# Altium PCB gravpower 007.PcbDoc (part 2 of 2)
Units mil, origin at the board's own origin, x right, y up, seen from the top; angles counter-clockwise.
Board outline 3267.72 x 2322.83 mil, 4 copper layers (Top Layer, Signal Layer 1, Signal Layer 2, Bottom Layer), stack 59.3 mil thick; 146 components, 91 nets, 539 pads, 438 vias.
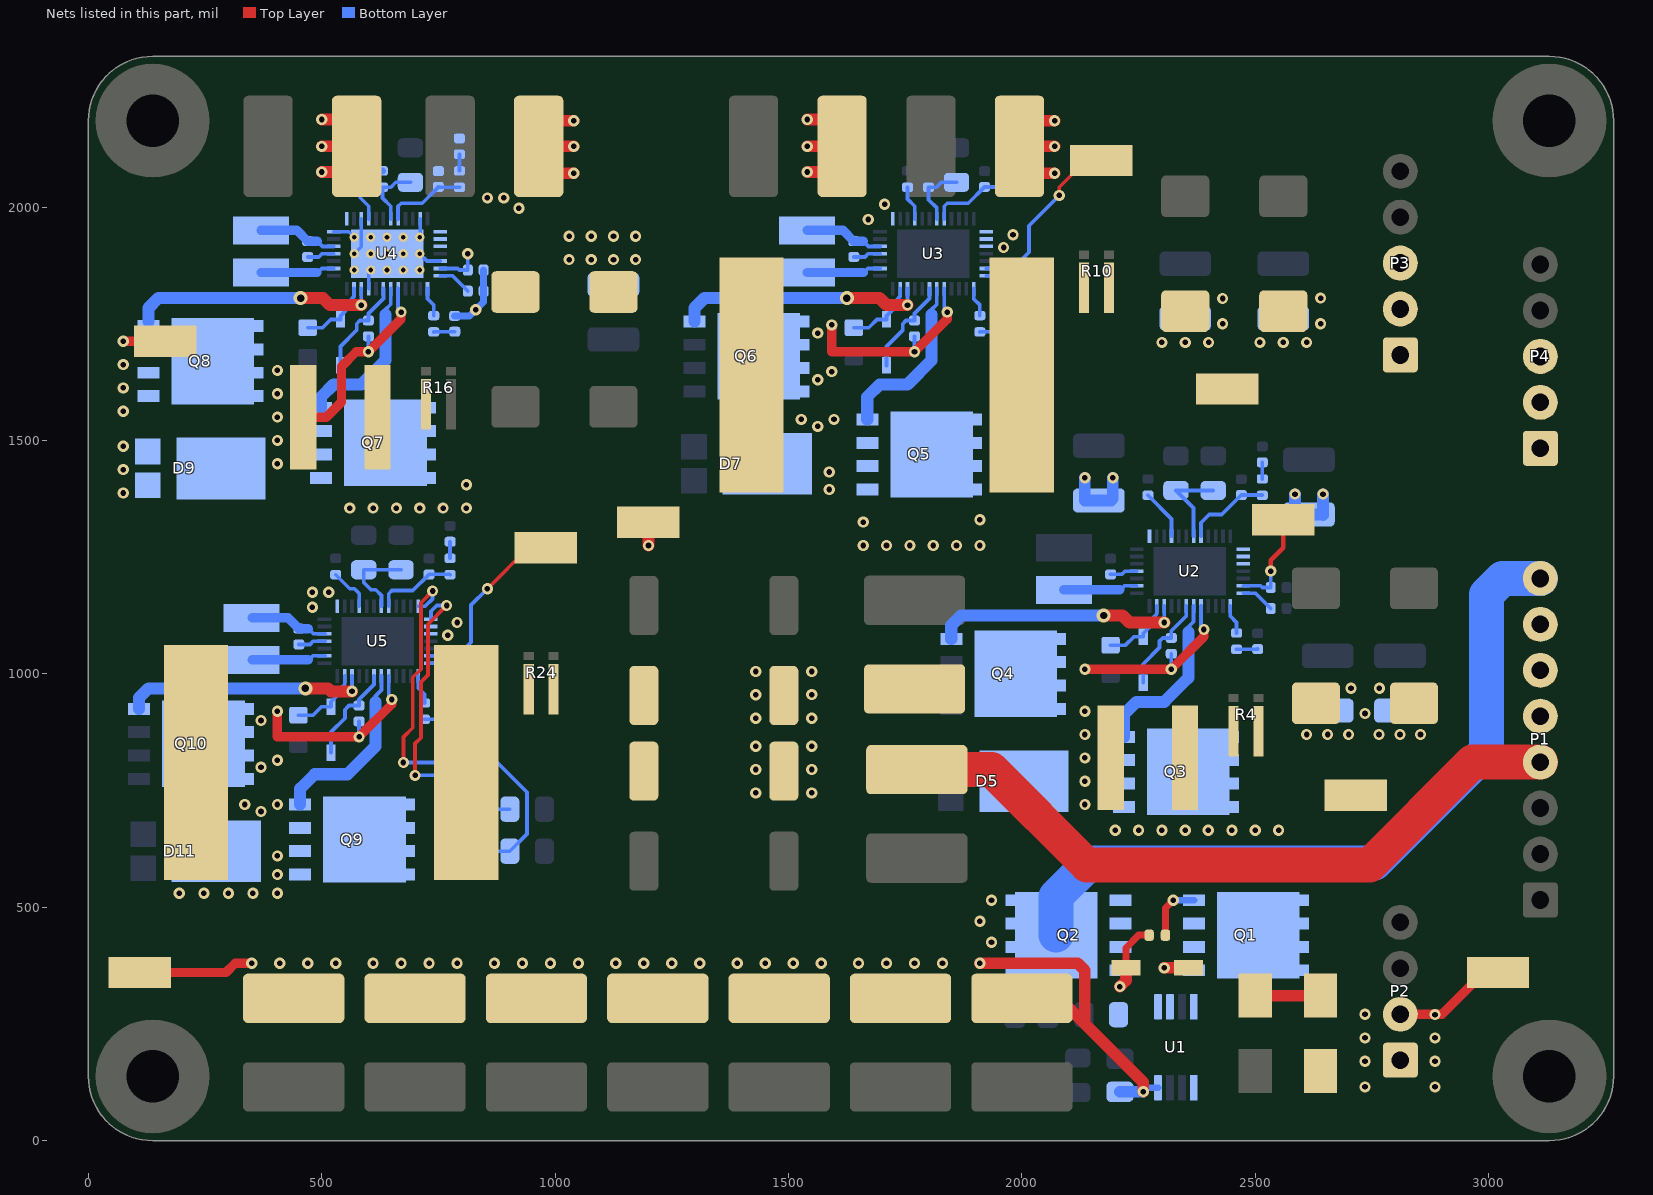
[diagram p4: the nets of this part, all layers, seen from the top]

## Via types
v1: diameter 24, hole 12, Top Layer to Bottom Layer, tented both sides, 374 vias
v2: diameter 20, hole 10, Top Layer to Bottom Layer, 60 vias
v3: diameter 30, hole 16, Top Layer to Bottom Layer, 4 vias

## Nets (pads, with @x,y where several pads share a name; then routed paths per layer and width w, separated by ;. In a path a pad name is that pad's centre, name@x,y a point inside that pad or via, vN(x,y) a via of type N, cw(c..) or ccw(c..) an arc to the next point about the centre after c; other vN are vias at no path point) (continued)
NetC10_2: C10.2 U2.35 | length 58.9
  Bottom Layer w8: C10.2@2190,1213.07 2213.67,1213.07 2220.6,1220 U2.35@2246.02,1220
NetC11_1: C11.1 D4.A U2.30 | length 155.6
  Bottom Layer w8: C11.1@2190,1061.5 2221.73,1061.5 2239.45,1079.21 D4.A@2260,1079.21 2260,1086.38 2280,1106.38 2280,1119.17 2289.13,1128.3 U2.30@2289.13,1145.39
NetC12_1: C12.1 D4.K U2.26 | length 213.4
  Bottom Layer w8: D4.K@2260,980.79 2260,1021.38 2295,1056.38 2295,1070.16 2301.77,1076.93 C12.1@2320,1076.93 2320,1091.93 2352.13,1124.06 U2.26@2352.13,1145.39
NetC12_2: C12.2 D5.K L2.1 Q3.1 Q3.2 Q3.3 Q4.5 Q4.6 Q4.7 Q4.8 Q4.9 U2.24 | length 385.1
  Top Layer w20: v1(2135,1010) v1(2320,1010) 2390,1080 v1(2390,1095)
  Bottom Layer w8: v1(2320,1010) C12.2@2320,1043.07 ; U2.24@2383.62,1145.39 2383.62,1101.38 v1(2390,1095)
  other v1: 2135,720 2135,770 2135,820 2135,870 2135,920
NetC19_2: C19.2 R8.2 U2.8 | length 185.3
  Bottom Layer w8: U2.8@2383.62,1294.61 2383.62,1323.62 2401.34,1341.34 2428.27,1341.34 C19.2@2470,1383.07 2514.41,1383.07 R8.2@2515,1382.48
NetC20_1: C20.1 U2.19 | length 72.7
  Bottom Layer w8: U2.19@2473.98,1172.76 2500.32,1172.76 C20.1@2533.07,1140
NetC21_1: C21.1 R8.1 | length 35.6
  Bottom Layer w8: R8.1@2515,1417.52 C21.1@2515,1453.07
NetC22_1: C22.1 TP4.1 U2.18 | length 216.8
  Top Layer w10: v1(2532.95,1220) 2532.95,1242.95 2560,1270 TP4.1@2560,1330
  Bottom Layer w8: U2.18@2473.98,1188.5 2511.5,1188.5 2515,1185 C22.1@2533.07,1185 2533.07,1219.88 v1(2532.95,1220)
NetC23_2: C23.2 R9.2 | length 45.2
  Bottom Layer w8: R9.2@2460,1052.48 2504.41,1052.48 C23.2@2505,1053.07
NetC24_1: C24.1 L3.1 U3.36 | length 170.2
  Bottom Layer w8: 1660.43,1926.93 1671.61,1915.75 U3.36@1696.02,1915.75
  Bottom Layer w20: L3.1@1540,1950.08 1616.85,1950.08 C24.1@1640,1926.93 1660.43,1926.93
NetC24_2: C24.2 U3.35 | length 58.9
  Bottom Layer w8: C24.2@1640,1893.07 1663.67,1893.07 1670.6,1900 U3.35@1696.02,1900
NetC25_1: C25.1 D6.A U3.30 | length 155.6
  Bottom Layer w8: C25.1@1640,1741.5 1671.73,1741.5 1689.45,1759.21 D6.A@1710,1759.21 1710,1766.38 1730,1786.38 1730,1799.17 1739.13,1808.3 U3.30@1739.13,1825.39
NetC26_1: C26.1 D6.K U3.26 | length 213.4
  Bottom Layer w8: D6.K@1710,1660.79 1710,1701.38 1745,1736.38 1745,1750.16 1751.77,1756.93 C26.1@1770,1756.93 1770,1771.93 1802.13,1804.06 U3.26@1802.13,1825.39
NetC26_2: C26.2 D7.K L4.1 Q5.1 Q5.2 Q5.3 Q6.5 Q6.6 Q6.7 Q6.8 Q6.9 U3.24 | length 435.1
  Top Layer w20: v1(1592.5,1747.5) 1592.5,1690 v1(1770,1690) 1840,1760 v1(1840,1775)
  Bottom Layer w8: v1(1770,1690) C26.2@1770,1723.07 ; U3.24@1833.62,1825.39 1833.62,1781.38 v1(1840,1775)
  other v1: 1587.5,1395 1587.5,1432.5 1562.5,1530 1527.5,1545 1597.5,1545 1562.5,1630 1592.5,1647.5 1562.5,1730
NetC33_2: C33.2 R14.2 U3.8 | length 175.8
  Bottom Layer w8: U3.8@1833.62,1974.61 1833.62,2001.64 1840.3,2008.32 1885.25,2008.32 C33.2@1920,2043.07 1964.41,2043.07 R14.2@1965,2042.48
NetC34_1: C34.1 U3.19 | length 72.7
  Bottom Layer w8: U3.19@1923.98,1852.76 1950.32,1852.76 C34.1@1983.07,1820
NetC35_1: C35.1 R14.1 | length 35.6
  Bottom Layer w8: R14.1@1965,2077.52 C35.1@1965,2113.07
NetC36_1: C36.1 TP6.1 U3.18 | length 392
  Top Layer w8: v1(2080,2025) 2080,2042.5 2137.5,2100 TP6.1@2170,2100
  Bottom Layer w8: U3.18@1923.98,1868.5 1961.5,1868.5 1965,1865 C36.1@1983.07,1865 1983.07,1871.46 2015,1903.39 2015,1960 v1(2080,2025)
NetC37_2: C37.2 R15.2 | length 45.2
  Bottom Layer w8: R15.2@1910,1732.48 1910.59,1733.07 C37.2@1955,1733.07
NetC38_1: C38.1 L5.1 U4.36 | length 170.2
  Bottom Layer w8: 490.43,1926.93 501.61,1915.75 U4.36@526.02,1915.75
  Bottom Layer w20: L5.1@370,1950.08 446.85,1950.08 C38.1@470,1926.93 490.43,1926.93
NetC38_2: C38.2 U4.35 | length 58.9
  Bottom Layer w8: C38.2@470,1893.07 493.67,1893.07 500.6,1900 U4.35@526.02,1900
NetC39_1: C39.1 D8.A U4.30 | length 155.6
  Bottom Layer w8: C39.1@470,1741.5 501.73,1741.5 519.45,1759.21 D8.A@540,1759.21 540,1766.38 560,1786.38 560,1799.17 569.13,1808.3 U4.30@569.13,1825.39
NetC40_1: C40.1 D8.K U4.26 | length 213.4
  Bottom Layer w8: D8.K@540,1660.79 540,1701.38 575,1736.38 575,1750.16 581.77,1756.93 C40.1@600,1756.93 600,1771.93 632.13,1804.06 U4.26@632.13,1825.39
NetC40_2: C40.2 D9.K L6.1 Q7.1 Q7.2 Q7.3 Q8.5 Q8.6 Q8.7 Q8.8 Q8.9 U4.24 | length 442.1
  Top Layer w20: L6.1@460.47,1550 510,1550 542.5,1582.5 542.5,1658.5 574,1690 v1(600,1690) 670,1760 v1(670,1775)
  Bottom Layer w8: v1(600,1690) C40.2@600,1723.07 ; U4.24@663.62,1825.39 663.62,1781.38 v1(670,1775)
  other v1: 405,1450 405,1500 405,1550 405,1600 405,1650
NetC46_2: C46.2 R20.2 U4.8 | length 175.8
  Bottom Layer w8: U4.8@663.62,1974.61 663.62,2001.64 670.3,2008.32 715.25,2008.32 C46.2@750,2043.05 750.59,2042.46 R20.2@795,2042.46
NetC47_1: C47.1 U4.19 | length 72.7
  Bottom Layer w8: U4.19@753.98,1852.76 780.32,1852.76 C47.1@813.07,1820
NetC48_1: C48.1 R20.1 | length 35.6
  Bottom Layer w8: R20.1@795,2077.5 C48.1@795,2113.05
NetC49_1: C49.1 U4.18 | length 95.6
  Bottom Layer w8: U4.18@753.98,1868.5 791.5,1868.5 795,1865 C49.1@813.07,1865 813.07,1899.88 v1(812.95,1900)
NetC50_2: C50.2 R21.2 | length 45.2
  Bottom Layer w8: R21.2@740,1732.48 740.59,1733.07 C50.2@785,1733.07
NetC51_1: C51.1 L7.1 U5.36 | length 170.2
  Bottom Layer w8: 471.42,1096.93 482.6,1085.75 U5.36@506.02,1085.75 U5.36@507.01,1085.75
  Bottom Layer w20: L7.1@350.99,1120.08 427.84,1120.08 C51.1@450.99,1096.93 471.42,1096.93
NetC51_2: C51.2 U5.35 | length 58.9
  Bottom Layer w8: C51.2@450.99,1063.07 474.66,1063.07 481.59,1070 U5.35@506.02,1070 U5.35@507.01,1070
NetC52_1: C52.1 D10.A U5.30 | length 155.6
  Bottom Layer w8: C52.1@450,911.5 481.5,911.5 499.21,929.21 D10.A@520,929.21 520,940 540,960 540,968.74 549.13,977.88 U5.30@549.13,995.39
NetC53_1: C53.1 D10.K U5.26 | length 215.2
  Bottom Layer w8: D10.K@520,830.79 520,875.15 549.85,905 549.85,923.06 558.72,931.93 C53.1@580,931.93 580,945 612.13,977.13 U5.26@612.13,995.39
NetC53_2: C53.2 D11.K L8.1 Q9.1 Q9.2 Q9.3 Q10.5 Q10.6 Q10.7 Q10.8 Q10.9 U5.24 | length 425.1
  Top Layer w20: v1(405,920) 405,865 v1(580,865) 650,935 v1(650,945)
  Bottom Layer w8: v1(580,865) C53.2@580,898.07 ; U5.24@643.62,995.39 643.62,951.38 v1(650,945)
  other v1: 195,530 247.5,530 300,530 352.5,530 405,530 405,570 405,610 370,705 335,720 405,720 370,800 405,815 370,900
NetC60_2: C60.2 R30.2 U5.8 | length 175.8
  Bottom Layer w8: U5.8@643.62,1144.61 643.62,1171.64 650.3,1178.32 695.25,1178.32 C60.2@730,1213.07 774.41,1213.07 R30.2@775,1212.48
NetC61_1: C61.1 U5.19 | length 72.7
  Bottom Layer w8: U5.19@733.98,1022.76 760.32,1022.76 C61.1@793.07,990
NetC62_1: C62.1 R30.1 | length 35.6
  Bottom Layer w8: R30.1@775,1247.52 C62.1@775,1283.07
NetC63_1: C63.1 TP9.1 U5.18 | length 394.9
  Top Layer w8: v1(855,1182.5) 942.5,1270 TP9.1@980,1270
  Bottom Layer w8: U5.18@733.98,1038.5 766.5,1038.5 770,1035 C63.1@793.07,1035 793.07,1040.57 820,1067.5 820,1147.5 v1(855,1182.5)
NetC64_2: C64.2 R31.2 | length 45.2
  Bottom Layer w8: R31.2@720,902.48 764.41,902.48 C64.2@765,903.07
NetD1_1: D1.1 D3.1 | length 140
  Top Layer w25: D3.1@2500,310.71 D1.1@2640,310.71
NetD2_1: D2.1 Q1.1 Q1.2 Q1.3 Q2.1 Q2.2 Q2.3 U1.2 | length 52
  Top Layer w25: v1(2304.88,370) D2.1@2356.93,370
NetD2_2: D2.2 Q2.4 R1.1 R2.2 U1.1 | length 149
  Top Layer w15: D2.2@2223.07,370 2223.07,413.07 2250,440 R1.1@2272.48,440
  Top Layer w25: v1(2210,330) 2223.07,343.07 D2.2@2223.07,370
NetL1_2: L1.2 U2.33 | length 159.6
  Bottom Layer w8: 2210,1179.92 2211.42,1179.92 2220,1188.5 U2.33@2246.02,1188.5
  Bottom Layer w20: L1.2@2090,1179.92 2210,1179.92
NetL2_2: L2.2 R4.1
NetL3_2: L3.2 U3.33 | length 159.6
  Bottom Layer w8: 1660,1859.92 1661.42,1859.92 1670,1868.5 U3.33@1696.02,1868.5
  Bottom Layer w20: L3.2@1540,1859.92 1660,1859.92
NetL4_2: L4.2 R10.1
NetL5_2: L5.2 U4.33 | length 159.6
  Bottom Layer w8: 490,1859.92 491.42,1859.92 500,1868.5 U4.33@526.02,1868.5
  Bottom Layer w20: L5.2@370,1859.92 490,1859.92
NetL6_2: L6.2 R16.1
NetL7_2: L7.2 U5.33 | length 159.6
  Bottom Layer w8: 470.99,1029.92 472.4,1029.92 480.99,1038.5 U5.33@506.02,1038.5 U5.33@507.01,1038.5
  Bottom Layer w20: L7.2@350.99,1029.92 470.99,1029.92
NetL8_2: L8.2 R24.1
NetQ1_4: Q1.4 R1.2 | length 126.3
  Top Layer w15: R1.2@2307.52,440 2307.52,498.08 v1(2324.44,515)
  Bottom Layer w14: v1(2324.44,515) Q1.4@2368.78,515
NetQ3_4: Q3.4 U2.25 | length 377.1
  Bottom Layer w8: 2356.57,1090 2356.57,1100.5 2367.87,1111.8 U2.25@2367.87,1145.39
  Bottom Layer w26: Q3.4@2218.78,865 2218.78,913.39 2245.39,940 2305,940 2356.57,991.57 2356.57,1090
NetQ4_4: Q4.4 U2.29 | length 535.3
  Top Layer w26: v3(2175,1125) 2215.75,1125 2230.75,1110 v1(2304.88,1110)
  Bottom Layer w8: v1(2304.88,1110) U2.29@2304.88,1145.39
  Bottom Layer w26: Q4.4@1848.78,1075 1848.78,1103.78 1870,1125 v3(2175,1125)
NetQ5_4: Q5.4 U3.25 | length 377.1
  Bottom Layer w8: 1806.57,1770 1806.57,1780.5 1817.87,1791.8 U3.25@1817.87,1825.39
  Bottom Layer w26: Q5.4@1668.78,1545 1668.78,1593.39 1695.39,1620 1755,1620 1806.57,1671.57 1806.57,1770
NetQ6_4: Q6.4 U3.29 | length 535.3
  Top Layer w26: v3(1625,1805) 1695,1805 1710,1790 v1(1754.88,1790)
  Bottom Layer w8: v1(1754.88,1790) U3.29@1754.88,1825.39
  Bottom Layer w26: Q6.4@1298.78,1755 1298.78,1783.78 1320,1805 v3(1625,1805)
NetQ7_4: Q7.4 U4.25 | length 352.1
  Bottom Layer w8: 636.57,1770 636.57,1780.5 647.87,1791.8 U4.25@647.87,1825.39
  Bottom Layer w26: Q7.4@498.78,1570 498.78,1593.39 525.39,1620 585,1620 636.57,1671.57 636.57,1770
NetQ8_4: Q8.4 U4.29 | length 535.3
  Top Layer w26: v3(455,1805) 502.5,1805 517.5,1790 v1(584.88,1790)
  Bottom Layer w8: v1(584.88,1790) U4.29@584.88,1825.39
  Bottom Layer w26: Q8.4@128.78,1755 128.78,1783.78 150,1805 v3(455,1805)
NetQ9_4: Q9.4 U5.25 | length 388.5
  Bottom Layer w8: 615,940 615,952.51 627.87,965.39 U5.25@627.87,995.39
  Bottom Layer w26: Q9.4@453.78,720 453.78,753.78 485,785 555,785 615,845 615,940
NetQ10_4: Q10.4 U5.29 | length 523.8
  Top Layer w26: v3(465,968.97) 513.54,968.97 520,962.51 v1(564.88,962.51)
  Bottom Layer w8: v1(564.88,962.51) U5.29@564.88,995.39
  Bottom Layer w26: Q10.4@108.78,925 108.78,948.78 128.97,968.97 v3(465,968.97)
NetR5_2: R5.2 R7.2 U2.7 | length 194.1
  Bottom Layer w8: U2.7@2367.87,1294.61 2367.87,1355.12 R7.2@2330,1392.99 R5.2@2410,1392.99
NetR6_1: R6.1 U2.4 | length 108.8
  Bottom Layer w8: R6.1@2270,1382.48 2320.63,1331.85 U2.4@2320.63,1294.61
NetR9_1: R9.1 U2.20 | length 63.4
  Bottom Layer w8: U2.20@2446.61,1145.39 2446.61,1123.39 2460,1110 R9.1@2460,1087.52
NetR11_2: R11.2 R13.2 U3.7 | length 139.6
  Bottom Layer w8: U3.7@1817.87,1974.61 1817.87,1997.92 1800,2015.8 R13.2@1800,2042.48 1816.99,2042.48 1827.5,2052.99 R11.2@1860,2052.99
NetR12_1: R12.1 U3.4 | length 74.3
  Bottom Layer w8: R12.1@1755,2042.48 1755,2017.48 1770.63,2001.85 U3.4@1770.63,1974.61
NetR15_1: R15.1 U3.20 | length 63.4
  Bottom Layer w8: U3.20@1896.61,1825.39 1896.61,1803.39 1910,1790 R15.1@1910,1767.52
NetR17_2: R17.2 R19.2 U4.7 | length 139.6
  Bottom Layer w8: U4.7@647.87,1974.61 647.87,2001.64 630,2019.52 R19.2@630,2042.48 648.17,2042.48 658.66,2052.97 R17.2@690,2052.97
NetR18_1: R18.1 U4.4 | length 75.4
  Bottom Layer w8: R18.1@582.5,2042.48 582.5,2019.98 600.63,2001.85 U4.4@600.63,1974.61
NetR21_1: R21.1 U4.20 | length 63.4
  Bottom Layer w8: U4.20@726.61,1825.39 726.61,1803.39 740,1790 R21.1@740,1767.52
NetR22_1: R22.1 R25.2 U5.12 | length 946.8
  Top Layer w8: v1(675,810) 675,864.7 695,884.7 695,992.5 712.5,1010 712.5,1152.5 v1(737.5,1177.5)
  Bottom Layer w8: v1(675,810) 876.28,810 940,746.28 940,657.01 R25.2@902.99,620 R22.1@837.01,620 ; U5.12@706.61,1144.61 721.49,1144.61 737.5,1160.61 v1(737.5,1177.5)
NetR23_1: R23.1 R26.2 U5.13 | length 705.2
  Top Layer w8: v1(700,782.5) 700,850.58 712.5,863.08 712.5,982.5 727.5,997.5 727.5,1106.46 v1(767.5,1146.46)
  Bottom Layer w8: v1(700,782.5) 806.93,782.5 837.01,752.42 R23.1@837.01,710 R26.2@902.99,710 ; U5.13@733.98,1117.24 733.98,1133.98 746.46,1146.46 v1(767.5,1146.46)
NetR27_2: R27.2 R29.2 U5.7 | length 179.9
  Bottom Layer w8: U5.7@627.87,1144.61 627.87,1167.92 615.8,1180 605.8,1180 590,1195.8 R29.2@590,1222.99 R27.2@670,1222.99
NetR28_1: R28.1 U5.4 | length 94.7
  Bottom Layer w8: R28.1@530,1212.48 559.98,1182.5 569.98,1182.5 580.63,1171.85 U5.4@580.63,1144.61
NetR31_1: R31.1 U5.20 | length 63.4
  Bottom Layer w8: U5.20@706.61,995.39 706.61,968.97 720,955.58 R31.1@720,937.52
V3V8: C15.2 C16.2 C17.1 C18.1 P1.5 P1.6 P1.7 R4.2 TP3.1
  other v1: 2610,870 2655,870 2700,870 2765,870 2810,870 2854.02,870 2735,915 2705,968.97 2765.99,968.97
V5V5: C13.2 C14.2 C29.2 C30.2 C31.1 C32.1 P3.1 P3.2 P4.1 P4.2 Q3.5 Q3.6 Q3.7 Q3.8 Q3.9 R10.2 TP5.1 U2.1 U2.13 U2.14 U2.15 | length 304.4
  Bottom Layer w25: v1(2135,1420) 2135,1371.34 C13.2@2165,1371.34 2191.34,1371.34 2195,1375 v1(2195,1420) ; v1(2585,1385) 2585,1341.34 C14.2@2615,1341.34 2643.66,1341.34 2645,1340 v1(2645,1385)
  other v1: 2200,665 2250,665 2299.92,665 2350,665 2399.37,665 2450,665 2500,665 2550,665 2300,1710 2350,1710 2400,1710 2510,1710 2560,1710 2610,1710 2430,1750 2640,1750 2430,1804.02 2640,1805
V5V5N: C41.2 C42.2 C43.1 C46.1 C47.2 C48.2 C49.2 C50.1 D9.A P3.3 P4.3 Q8.1 Q8.2 Q8.3 R18.2 R19.1 TP7.1 U4.3 U4.11 U4.17 U4.28 U4.38 U4.39 | length 541.6
  Top Layer w20: v1(75,1712.5) TP7.1@165,1712.5
  Bottom Layer w8: U4.38@526.02,1947.24 557.76,1947.24 v2(570,1935) ; v2(570,1900) 584.88,1914.88 U4.3@584.88,1974.61 ; U4.28@600.63,1825.39 600.63,1860.63 v2(605,1865) ; v2(710,1900) 725.75,1884.25 U4.17@753.98,1884.25 ; v2(710,1935) 710.87,1935.87 U4.11@710.87,1974.61
  Bottom Layer w15: R18.2@582.5,2077.52 R19.1@630,2077.52 ; C50.1@785,1766.93 816.93,1766.93 v1(830,1780) 846.93,1796.93 C47.2@846.93,1820 C49.2@846.93,1865
  other v1: 75,1387.5 75,1437.5 75,1487.5 75,1562.5 75,1612.5 75,1662.5 1030,1887.5 1077.5,1887.5 1125,1887.5 1172.5,1887.5 1030,1937.5 1077.5,1937.5 1125,1937.5 1172.5,1937.5
  other v2: 570,1865 640,1865 675,1865 710,1865 605,1900 640,1900 675,1900 605,1935 640,1935 675,1935
V29: C27.2 C28.2 C44.2 C45.2 C54.2 C55.2 C56.1 C57.1 C58.1 C59.1 P1.4 Q5.5 Q5.6 Q5.7 Q5.8 Q5.9 Q7.5 Q7.6 Q7.7 Q7.8 Q7.9 R24.2 TP8.1 U3.1 U3.13 U3.14 U3.15 U4.1 U4.13 U4.14 U4.15 | length 2912
  Top Layer w25: v1(500,2075) 574.88,2075 C44.2@574.88,2130 ; v1(500,2130) C44.2@574.88,2130 ; v1(500,2187.5) 574.88,2187.5 C44.2@574.88,2130 ; v1(1039.76,2072.5) 964.88,2072.5 C45.2@964.88,2130 ; v1(1039.76,2130) C45.2@964.88,2130 ; v1(1039.76,2185) 964.88,2185 C45.2@964.88,2130 ; v1(1200,1275) TP8.1@1200,1325 ; v1(1540,2075) 1615.12,2075 C27.2@1615.12,2130 ; v1(1540,2130) C27.2@1614.88,2130 C27.2@1615.12,2130 ; v1(1540,2187.5) 1615.12,2187.5 C27.2@1615.12,2130 ; v1(2070,2072.48) 1994.88,2072.48 C28.2@1994.88,2129.98 ; v1(2070,2129.98) C28.2@1994.88,2129.98 ; v1(2070,2184.98) 1994.88,2184.98 C28.2@1994.88,2129.98
  Top Layer w75: C55.2@1775,794.88 1935.12,794.88 2140,590 2745,590 2965.79,810.79 P1.4@3110.67,810.79
  other v1: 1430,745 1550,745 1430,795 1550,795 1430,845 1550,845 1430,905 1550,905 1430,955 1550,955.58 1430,1005 1550,1005 1660,1275 1710,1275 1760,1275 1810,1275 1860,1275 1910,1275 1660,1325 1910,1330 560,1355 610,1355 660,1355 710,1355 760,1355 810,1355 810,1405 1960.87,1913.37 1980.87,1940.87 1670.87,1973.37 922.5,1997.5 1705.87,2005.87 855,2019.52 890,2019.52
V48: C1.1 C2.2 C3.2 C4.2 C5.2 C6.2 C7.2 C8.2 P1.8 Q2.5 Q2.6 Q2.7 Q2.8 Q2.9 Q9.5 Q9.6 Q9.7 Q9.8 Q9.9 R22.2 R23.2 TP2.1 U1.8 U5.1 U5.14 U5.15 | length 2610.2
  Top Layer w20: TP2.1@110,360 295,360 315,380 v1(350,380)
  Top Layer w25: v1(1910,380) 2120,380 2135,365 2135,250 ; C5.2@2040.06,344.94 2135,250 ; v1(2260,105) 2260,125 2135,250
  Bottom Layer w14: v1(2260,105) 2268.39,113.39 U1.8@2291.61,113.39
  Bottom Layer w25: C1.1@2210,104.57 2259.57,104.57 v1(2260,105)
  Bottom Layer w75: Q2.9@2073.43,440 2073.43,523.43 2145,595 2755.61,595 2995,834.39 2995,1170 3029.49,1204.49 P1.8@3110.67,1204.49
  other v1: 410,380 470,380 530,380 610,380 670,380 730,380 790,380 870,380 930,380 990,380 1050,380 1130,380 1190,380 1250,380 1310,380 1390,380 1450,380 1510,380 1570,380 1650,380 1710,380 1770,380 1830,380 1935,425 1910,470 1935,515 770,1082.5 790,1110 480,1142.5 480,1175 515,1175
V48_EXT: D1.2 P2.1 P2.2 Q1.5 Q1.6 Q1.7 Q1.8 Q1.9 TP1.1 U1.4 U1.5 | length 246.3
  Top Layer w20: P2.2@2810.67,270.79 2900.08,270.79 2989.29,360 TP1.1@3020,360
  other v1: 2735,115 2885,115 2735,170 2885,170 2735,220 2885,220 2735,270.79 2885,270
pads on no net: U1.3 U1.7 U2.2 U2.5 U2.6 U2.9 U2.10 U2.16 U2.23 U2.27 U2.31 U2.32 U2.34 U2.37 U3.2 U3.5 U3.6 U3.9 U3.10 U3.16 U3.23 U3.27 U3.31 U3.32 U3.34 U3.37 U4.2 U4.5 U4.6 U4.9 U4.10 U4.16 U4.23 U4.27 U4.31 U4.32 U4.34 U4.37 U5.2 U5.5 U5.6 U5.9 U5.10 U5.16 U5.23 U5.27 U5.31 U5.32 U5.34 U5.37

## Polygon pours and split planes (outlines as drawn)
V48 on Top Layer "V48_L01_P000" (solid, remove dead copper, pour order 0): 280,225 2160,225 2160,535 1735,535 1660,460 280,460
V5V5N on Top Layer "V5V5N_L01_P066" (solid, remove dead copper, pour order 66): 855,1770 1172.5,1770 1187.5,1785 1187.5,1962.5 855,1962.5
NetC26_2 on Top Layer "NETC26_2_L01_P076" (solid, remove dead copper, pour order 76): 1350,1892.5 1350,1380 1612.5,1380 1612.5,1775 1597.5,1790 1597.5,1892.5
V29 on Top Layer "V29_L01_P016" (solid, remove dead copper, pour order 16): 985,1022.5 1015,1022.5 1050,1057.5 1600,1057.5 1622.5,1035 1975,1035 1975,725 1650,725 1622.5,697.5 1062.5,697.5 985,775
NetL6_2 on Top Layer "NETL6_2_L01_P064" (solid, remove dead copper, pour order 64): 735,1632.5 705,1632.5 675,1662.5 590,1662.5 590,1437.5 695,1437.5 735,1477.5
V48_EXT on Top Layer "V48_EXT_L01_P008" (solid, remove dead copper, pour order 8): 2915,315 2700,315 2700,205 2685,190 2615,190 2620,185 2620,110 2685,110 2715,80 2915,80
V5V5 on Top Layer "V5V5_L01_P078" (solid, remove dead copper, pour order 78): 2175,1880 2645.39,1880 2857.2,1880 2915,1822.2 3062.2,1675 3195,1675 3195,1400 2890,1400 2715,1575 2211.16,1575 2175,1611.16
V3V8 on Top Layer "V3V8_L01_P018" (solid, remove dead copper, pour order 18): 3200,1150 3005,1150 2905,1050 2601.5,1050 2550,998.5 2550,950 2530,930 2495,930 2495,745 2530,710 2775,710 2930,865 3200,865
GND on Top Layer "GND_L01_P080" (solid, remove dead copper, pour order 80): -200,2375 3300,2375 3300,-25 -200,-25
V48 on Bottom Layer "V48_L04_P050" (solid, remove dead copper, pour order 50): 537.5,1130 465,1130 465,1190 522.5,1190 537.5,1175
NetD2_2 on Bottom Layer "NETD2_2_L04_P012" (solid, remove dead copper, pour order 12): 2185,240 2299.92,240 2300,239.92 2300,315 2260,315 2235,340 2235,380 2185,380
V5V5 on Bottom Layer "V5V5_L04_P022" (solid, remove dead copper, pour order 22): 2265,905 2265,700 2250,685 2185,685 2185,650 2600,650 2600,775 2470,905
V5V5 on Bottom Layer "V5V5_L04_P024" (solid, remove dead copper, pour order 24): 2277.76,1280 2200,1280 2150,1330 2120,1330 2120,1385 2220,1385 2220,1360 2245,1335 2270,1335 2277.76,1327.24
V29 on Bottom Layer "V29_L04_P054" (solid, remove dead copper, pour order 54): 1728.37,1960.87 1655.87,1960.87 1655.87,2020.87 1713.37,2020.87 1728.37,2005.87
NetC40_2 on Bottom Layer "NETC40_2_L04_P058" (solid, remove dead copper, pour order 58): 525,1515 465,1515 465,1600.6 435,1630.6 435,1755 420,1770 175,1770 175,1370 525,1370
V29 on Bottom Layer "V29_L04_P072" (solid, remove dead copper, pour order 72): 545,1340 835,1340 835,1590 545,1590
V29 on Bottom Layer "V29_L04_P074" (solid, remove dead copper, pour order 74): 1640,1255 2000,1255 2000,1590 1715,1590 1715,1360 1640,1360
V48 on Bottom Layer "V48_L04_P004" (solid, remove dead copper, pour order 4): 280,225 2160,225 2160,560 1760,560 1690,490 835,490 785,540 785,751.03 500,751.03 500,545 455,500 280,500
NetC53_2 on Bottom Layer "NETC53_2_L04_P006" (solid, remove dead copper, pour order 6): 442.5,512.5 485,555 485,755 420,820 420,945 155,945 155,512.5
NetC12_2 on Bottom Layer "NETC12_2_L04_P020" (solid, remove dead copper, pour order 20): 2245,845 2185,845 2185,930.6 2155,960.6 2155,1085 2140,1100 1895,1100 1895,700 2245,700
V5V5 on Bottom Layer "V5V5_L04_P026" (solid, remove dead copper, pour order 26): 2460,1230 2540,1230 2590,1280 2635,1280 2660,1305 2660,1355 2560,1355 2560,1325 2507.5,1272.5 2460,1272.5
GND on Bottom Layer "GND_L04_P036" (solid, remove dead copper, pour order 36): 1875,665 1650,665 1650,1100 1875,1100
V5V5N on Bottom Layer "V5V5N_L04_P048" (solid, remove dead copper, pour order 48): 157.5,1362.5 50,1362.5 50,1762.5 157.5,1762.5
V48 on Bottom Layer "V48_L04_P052" (solid, remove dead copper, pour order 52): 720.08,1080 752.5,1080 762.5,1070 805,1070 805,1125 770.26,1125 752.76,1107.5 720.08,1107.5
V29 on Bottom Layer "V29_L04_P056" (solid, remove dead copper, pour order 56): 1910.94,1910.87 1943.37,1910.87 1953.37,1900.87 1995.87,1900.87 1995.87,1955.87 1961.12,1955.87 1960.26,1955 1910.94,1955
NetC26_2 on Bottom Layer "NETC26_2_L04_P060" (solid, remove dead copper, pour order 60): 1695,1525 1635,1525 1635,1610.6 1605,1640.6 1605,1765 1590,1780 1345,1780 1345,1380 1695,1380
no net on Bottom Layer "NONET_L04_P062" (solid, remove dead copper, pour order 62): 1327.5,1350 1195,1350 1195,1772.5 1327.5,1772.5
V29 on Bottom Layer "V29_L04_P082" (solid, remove dead copper, pour order 82): 740,1910 820,1910 870,1960 915,1960 940,1985 940,2035 840,2035 840,2005 790,1955 740,1955
V48_EXT on Bottom Layer "V48_EXT_L04_P010" (solid, remove dead copper, pour order 10): 2915,80 2360,80 2360,314.77 2370.23,325 2395,325 2415.12,345.12 2415.12,540 2710,540 2725,525 2725,340 2750,315 2915,315
NetD2_1 on Bottom Layer "NETD2_1_L04_P014" (solid, remove dead copper, pour order 14): 2310.12,260 2310,320 2305,325 2265,325 2246.02,343.98 2246.02,390 2185,390 2185,540 2395,540 2395,345 2385,335 2335,335 2325,325 2325,260
V5V5N on Bottom Layer "V5V5N_L04_P070" (solid, remove dead copper, pour order 70): 1187.5,1800 1000,1800 1000,2007.5 945,2062.5 547.5,2062.5 547.5,2300 2787.5,2300 3195,1892.5 3195,1632.5 2990,1632.5 2935,1687.5 2935,1777.5 2882.5,1830 2735,1830 2697.5,1867.5 2697.5,2085 2582.5,2200 1237.5,2200 1187.5,2150
V29 on Bottom Layer "V29_L04_P084" (solid, remove dead copper, pour order 84): 557.76,1960 505,1960 440,2025 440,2205 530,2205 530,2065 546.54,2048.46 557.76,2048.46
GND on Bottom Layer "GND_L04_P088" (solid, remove dead copper, pour order 88): -44.73,-57.11 3405.27,-57.11 3405.27,2367.89 -44.73,2367.89
V48 on Signal Layer 1 "V48_L02_P034" (solid, remove dead copper, pour order 34): 2160,560 1762.2,560 1692.2,490 834.61,490 785,539.61 785,1200 25,1200 25,325.49 25.49,325 280,325 280,225 2160,225
V29 on Signal Layer 1 "V29_L02_P030" (solid, remove dead copper, pour order 30): 810,880 810,775 810,550 845,515 1675,515 1745,585 1925,585 1925,1850 2175,1850 2175,2300 450,2300 450,2000 1275,2000 1275,1575 375,1575 375,1225 810,1225
V5V5N on Signal Layer 1 "V5V5N_L02_P042" (solid, remove dead copper, pour order 42): 349.42,1225 25,1225 25.49,1225.49 25.49,1975 1250,1975 1250,1600 350,1600
V3V8 on Signal Layer 1 "V3V8_L02_P038" (solid, remove dead copper, pour order 38): 2575,825 3250,825 3250,1150 2575,1150
V5V5 on Signal Layer 1 "V5V5_L02_P040" (solid, remove dead copper, pour order 40): 2600,585 1950,585 1950,1822.5 2857.5,1822.5 3055,1625 3250,1625 3250,1175 2550,1175 2550,800 2600,800
V48_EXT on Signal Layer 1 "V48_EXT_L02_P044" (solid, remove dead copper, pour order 44): 2185,560 2185,75 2950,75 2950,300 3250,300 3250,799.61 3249.61,800 2625,800 2625,560
GND on Signal Layer 1 "GND_L02_P046" (solid, remove dead copper, pour order 46): -25,-25 3300,-25 3300,2350 -25,2350
GND on Signal Layer 2 "GND_L03_P002" (solid, remove dead copper, pour order 2): -25,-25 3300,-25 3300,2350 -25,2350

## Keep-outs
Top Layer:
  lines w2: 757.5,1635 757.5,1500 782.5,1475 1170,1475 ; 795,1635 805,1635 832.5,1662.5 1075,1662.5

## Other copper
Top Layer:
  rectangle net NetC12_2: 2110,705 2220,935
  rectangle net NetC40_2: 380,1435 490,1665
  rectangle net NetC53_2: 160,512.5 420,1062.5
  region net NetL8_2: 750,560 910,560 955,605 955,1020 923.07,1020 883.07,1060 750,1060
  region net NetL2_2: 2465,930 2325,930 2325,710 2430,710 2465,745
  region net NetL4_2: 1930.87,1392.12 2072.12,1392.12 2145,1465 2145,1880 2090,1880 2077.88,1892.12 1930.87,1892.12
Bottom Layer:
  rectangle net V3V8: 2590,850 2875,985
  rectangle net V5V5: 2275,1675 2665,1825

## Silkscreen, mask and mechanical layers (free items; w line width, h text height)
Bottom Overlay:
  lines w30: 830,40 1690,40 1690,247.5 1665,272.5 830,272.5 830,40
  text "SIGNAL LABORATORIES" at 1705,305 h55
  text "REV 2" at 650,225 h55
  text "QUAD POWER" at 1640,172.5 h55
  text "5/28/18" at 697.5,107.5 h55
  text "SUPPLY BOARD" at 1640,85 h55
Component Bot:
  lines w5: 375,0 3375,0 3375,3000 375,3000 375,0
Board Outline:
  the board outline again, w5
Body Top:
  text "1. FRONT ASSEMBLY NOTE #1" at 730,2447.5 h45
  text "1. FRONT CONFORMAL COAT NOTE #1" at 730,2372.5 h45
Border Top:
  lines w5: -1908.46,-119.09 -1708.46,-119.09 ; -1908.46,2005.91 -1708.46,2005.91 ; -1908.46,4130.91 -1708.46,4130.91 ; 841.54,-2244.09 841.54,-2044.09 ; 841.54,6055.91 841.54,6255.91 ; 1591.54,-2044.09 1591.54,-844.09 2991.54,-844.09 ; 1591.54,-1204.09 2991.54,-1204.09 ; 1641.54,-1334.09 2041.54,-1334.09 ; 1856.54,-1614.09 1886.54,-1614.09 ; 1856.54,-1589.09 1886.54,-1589.09 ; 1856.54,-1514.09 1886.54,-1514.09 ; 1856.54,-1489.09 1886.54,-1489.09 ; 1856.54,-1414.09 1886.54,-1414.09 ; 1856.54,-1389.09 1886.54,-1389.09 ; 3591.54,-2244.09 3591.54,-2044.09 ; 3591.54,6055.91 3591.54,6255.91 ; 4391.54,-1744.09 8891.54,-1744.09 ; 4391.54,-1444.09 8891.54,-1444.09 ; 4391.54,-1144.09 5891.54,-1144.09 ; 4391.54,5655.91 8891.54,5655.91 ; 4391.54,5855.91 8891.54,5855.91 ; 4391.54,6055.91 4391.54,5455.91 8891.54,5455.91 ; 4991.54,5455.91 4991.54,6055.91 ; 5491.54,5455.91 5491.54,6055.91 ; 5891.54,-2044.09 5891.54,-1444.09 5891.54,-844.09 ; 6341.54,-2244.09 6341.54,-2044.09 ; 6341.54,6055.91 6341.54,6255.91 ; 7991.54,-2044.09 7991.54,-1444.09 ; 8266.54,5455.91 8266.54,6055.91 ; 8891.54,-2047.2 8891.54,6052.8 ; 8891.54,-119.09 9091.54,-119.09 ; 8891.54,2002.8 9091.54,2002.8 ; 8891.54,4130.91 9091.54,4130.91 ; 8891.54,6055.91 -1708.46,6055.91 -1708.46,-2044.09 8891.54,-2044.09 ; 9091.54,-2247.2 9091.54,6252.8 ; 9091.54,-2244.09 -1908.46,-2244.09 -1908.46,6255.91 9091.54,6255.91 ; 2991.54,-844.09 4391.54,-844.09 ; 2991.54,-844.09 2991.54,-2044.09 4391.54,-2044.09 ; 4391.54,-2044.09 8891.54,-2044.09 ; 4391.54,-2044.09 4391.54,-844.09 ; 4391.54,-844.09 5891.54,-844.09 ; 5891.54,-844.09 8891.54,-844.09 8891.54,-2044.09
  lines w7: 1871.54,-1604.09 1871.54,-1574.09 ; 1871.54,-1504.09 1871.54,-1474.09 ; 1871.54,-1404.09 1871.54,-1374.09
  text "1" at -557.13,6120.91 h70
  text "2" at 2193.54,6120.91 h70
  text "3" at 4938.54,6120.91 h70
  text "4" at 7689.55,6120.91 h70
  text "REV" at 4441.54,5905.91 h66.93
  text "DATE" at 5041.54,5905.91 h66.93
  text "DESC" at 5541.54,5905.91 h66.93
  text "ENG" at 8341.54,5905.91 h66.93
  text "1" at 4441.54,5705.91 h66.93
  text "*" at 5041.54,5705.91 h66.93
  text "INITIAL RELEASE" at 5541.54,5705.91 h66.93
  text "*" at 8341.54,5705.91 h66.93
  text "A" at -1833.46,5102.91 h70
  text "A" at 8966.54,5102.91 h70
  text "B" at 8966.54,3056.65 h70
  text "B" at -1833.46,2977.91 h70
  text "C" at -1833.46,852.91 h70
  text "C" at 8966.54,852.91 h70
  text "ENGINEER:" at 4441.54,-944.09 h45
  text "TITLE:" at 5941.54,-944.09 h45
  text "ALL DIMENSIONS ARE IN MM (INCHES)" at 1666.54,-1019.09 h47.24
  text "Signal Laboratories" at 3091.54,-1019.09 h70
  text "*" at 4441.54,-1069.09 h70
  text "3479 Edison Way" at 3091.54,-1119.09 h70
  text "TOLERANCES:" at 2101.54,-1184.09 h47.24
  text "Menlo Park CA 94025" at 3091.54,-1219.09 h70
  text "GravPower" at 5966.54,-1219.09 h86.61
  text "PCB DESIGNER:" at 4441.54,-1239.09 h45
  text "D" at -1833.46,-1267.09 h70
  text "D" at 8966.54,-1267.09 h70
  text "DECIMALS" at 1666.54,-1294.09 h47.24
  text "(877) 778-8435" at 3091.54,-1319.09 h70
  text "*" at 4441.54,-1369.09 h70
  text ".X     0.1" at 1666.54,-1419.09 h47.24
  text ".XX    0.05" at 1666.54,-1519.09 h47.24
  text "DATE:" at 4441.54,-1544.09 h45
  text "PART NO.:" at 5941.54,-1544.09 h45
  text "REV:" at 8041.54,-1544.09 h45
  text ".XXX   0.005" at 1666.54,-1619.09 h47.24
  text "*" at 4441.54,-1669.09 h66.93
  text "-" at 5941.54,-1669.09 h70
  text "1" at 8041.54,-1669.09 h70
  text "*UNLESS OTHERWISE NOTED" at 1641.54,-1844.09 h47.24
  text "FILE NAME:" at 4441.54,-1844.09 h45
  text "DWG NO:" at 5941.54,-1844.09 h45
  text "SCALE:" at 8041.54,-1844.09 h45
  text ".PCB_FILE_NAME_NO_PATH" at 4491.54,-1964.09 h70
  text "-" at 5941.54,-1969.09 h70
  text "1:1" at 8041.54,-1969.09 h70
  text "1" at -557.13,-2179.09 h70
  text "2" at 2193.54,-2179.09 h70
  text "3" at 4938.54,-2179.09 h70
  text "4" at 7689.55,-2179.09 h70
Drill Drawing:
  lines w60: -984.25,-511.81 1889.76,-511.81 1889.76,2716.54 -984.25,2716.54 -984.25,-511.81
  text "1. FABRICATION NOTES" at 741.61,2376.24 h45
  text "CONSTRAINT: 3mm(MAX) HEIGHT ON BOTTOM SIDE" at -866.14,-236.22 h60
  text "INSIDE \"DRILL DRAWING LAYER\" BOX" at -157.48,-354.33 h60
Body Bottom:
  text "1. BOTTOM ASSEMBLY NOTE #1" at 2655,2447.5 h45
  text "1. BOTTOM CONFORMAL COAT NOTE #1" at 2655,2372.5 h45
Border Bot:
  lines w5: -1908.46,-119.09 -1708.46,-119.09 ; -1908.46,2005.91 -1708.46,2005.91 ; -1908.46,4130.91 -1708.46,4130.91 ; -1708.46,-1744.09 2791.54,-1744.09 ; -1708.46,-1444.09 2791.54,-1444.09 ; -1708.46,5455.91 2791.54,5455.91 2791.54,6055.91 ; -1708.46,5655.91 2791.54,5655.91 ; -1708.46,5855.91 2791.54,5855.91 ; -1083.46,5455.91 -1083.46,6055.91 ; -808.46,-2044.09 -808.46,-1444.09 ; 841.54,-2244.09 841.54,-2044.09 ; 841.54,6055.91 841.54,6255.91 ; 1291.54,-2044.09 1291.54,-1444.09 1291.54,-844.09 ; 1291.54,-1144.09 2791.54,-1144.09 ; 1691.54,5455.91 1691.54,6055.91 ; 2191.54,5455.91 2191.54,6055.91 ; 3591.54,-2244.09 3591.54,-2044.09 ; 3591.54,6055.91 3591.54,6255.91 ; 4191.54,-1204.09 5591.54,-1204.09 ; 5141.54,-1334.09 5541.54,-1334.09 ; 5296.54,-1614.09 5326.54,-1614.09 ; 5296.54,-1589.09 5326.54,-1589.09 ; 5296.54,-1514.09 5326.54,-1514.09 ; 5296.54,-1489.09 5326.54,-1489.09 ; 5296.54,-1414.09 5326.54,-1414.09 ; 5296.54,-1389.09 5326.54,-1389.09 ; 5591.54,-2044.09 5591.54,-844.09 4191.54,-844.09 ; 6341.54,-2244.09 6341.54,-2044.09 ; 6341.54,6055.91 6341.54,6255.91 ; 8891.54,-2047.2 8891.54,6052.8 ; 8891.54,-2044.09 -1708.46,-2044.09 ; 8891.54,-119.09 9091.54,-119.09 ; 8891.54,2002.8 9091.54,2002.8 ; 8891.54,4130.91 9091.54,4130.91 ; 8891.54,6055.91 -1708.46,6055.91 -1708.46,-2044.09 ; 9091.54,-2247.2 9091.54,6252.8 ; 9091.54,-2244.09 -1908.46,-2244.09 -1908.46,6255.91 9091.54,6255.91 ; -1708.46,-2044.09 2791.54,-2044.09 ; -1708.46,-2044.09 -1708.46,-844.09 1291.54,-844.09 ; 1291.54,-844.09 2791.54,-844.09 ; 2791.54,-2044.09 4191.54,-2044.09 4191.54,-844.09 ; 2791.54,-2044.09 2791.54,-844.09 ; 2791.54,-844.09 4191.54,-844.09
  lines w7: 5311.54,-1604.09 5311.54,-1574.09 ; 5311.54,-1504.09 5311.54,-1474.09 ; 5311.54,-1404.09 5311.54,-1374.09
  text "4" at -506.48,6120.91 h70
  text "3" at 2244.54,6120.91 h70
  text "2" at 4989.54,6120.91 h70
  text "1" at 7740.2,6120.91 h70
  text "ENG" at -1158.46,5905.91 h66.93
  text "DESC" at 1641.54,5905.91 h66.93
  text "DATE" at 2141.54,5905.91 h66.93
  text "REV" at 2741.54,5905.91 h66.93
  text "J. Brinton" at -1158.46,5705.91 h66.93
  text "INITIAL RELEASE" at 1641.54,5705.91 h66.93
  text "5/15/18" at 2141.54,5705.91 h66.93
  text "1" at 2741.54,5705.91 h66.93
  text "J. Brinton" at -1158.46,5505.91 h66.93
  text "SMALL COPPER CHANGE (PULLED UVLO HIGH)" at 1641.54,5505.91 h66.93
  text "5/28/18" at 2141.54,5505.91 h66.93
  text "2" at 2741.54,5505.91 h66.93
  text "A" at -1783.46,5102.91 h70
  text "A" at 9016.54,5102.91 h70
  text "B" at 9016.54,3056.65 h70
  text "B" at -1783.46,2977.91 h70
  text "C" at -1783.46,852.91 h70
  text "C" at 9016.54,852.91 h70
  text "TITLE:" at 1241.54,-944.09 h45
  text "ENGINEER:" at 2741.54,-944.09 h45
  text "Signal Laboratories" at 4091.54,-1019.09 h70
  text "ALL DIMENSIONS ARE IN MM (INCHES)" at 5516.54,-1019.09 h47.24
  text "J. Brinton" at 2741.54,-1069.09 h70
  text "3479 Edison Way" at 4091.54,-1119.09 h70
  text "TOLERANCES:" at 5081.54,-1184.09 h47.24
  text "GravPower" at 1216.54,-1219.09 h86.61
  text "Menlo Park CA 94025" at 4091.54,-1219.09 h70
  text "PCB DESIGNER:" at 2741.54,-1239.09 h45
  text "D" at -1783.46,-1267.09 h70
  text "D" at 9016.54,-1267.09 h70
  text "DECIMALS" at 5516.54,-1294.09 h47.24
  text "(877) 778-8435" at 4091.54,-1319.09 h70
  text "J. Brinton" at 2741.54,-1369.09 h70
  text ".X     0.1" at 5516.54,-1419.09 h47.24
  text ".XX    0.05" at 5516.54,-1519.09 h47.24
  text "REV:" at -858.46,-1544.09 h45
  text "PART NO.:" at 1241.54,-1544.09 h45
  text "DATE:" at 2741.54,-1544.09 h45
  text ".XXX   0.005" at 5516.54,-1619.09 h47.24
  text "2" at -858.46,-1669.09 h70
  text "-" at 1241.54,-1669.09 h70
  text "5/28/2018" at 2741.54,-1669.09 h66.93
  text "SCALE:" at -858.46,-1844.09 h45
  text "DWG NO:" at 1241.54,-1844.09 h45
  text "FILE NAME:" at 2741.54,-1844.09 h45
  text "*UNLESS OTHERWISE NOTED" at 5541.54,-1844.09 h47.24
  text ".PCB_FILE_NAME_NO_PATH" at 2691.54,-1964.09 h70
  text "1:1" at -858.46,-1969.09 h70
  text "-" at 1241.54,-1969.09 h70
  text "4" at -506.48,-2179.09 h70
  text "3" at 2244.54,-2179.09 h70
  text "2" at 4989.54,-2179.09 h70
  text "1" at 7740.2,-2179.09 h70

## Dimensions
1889.76,2716.54 to 0,2322.83 on Drill Drawing

## Text inside footprints (layer, text, board x,y; h text height)
C17: Top Overlay "+" at 2867.56,838.54 h60 r90
C18: Top Overlay "+" at 2657.56,838.54 h60 r90
C31: Top Overlay "+" at 2377.56,1678.54 h60 r90
C32: Top Overlay "+" at 2587.56,1678.54 h60 r90
C41: Top Overlay "+" at 942.56,1473.54 h60 r90
C42: Top Overlay "+" at 1152.56,1473.54 h60 r90